# Altium PCB PCB0.PcbDoc
Units mil, origin at the board's own origin, x right, y up, seen from the top; angles counter-clockwise.
Board outline 3640 x 1815 mil, 4 copper layers (Top Layer, Layer 1, Layer 2, Bottom Layer), stack 23.756 mil thick; 46 components, 13 nets, 145 pads, 247 vias.
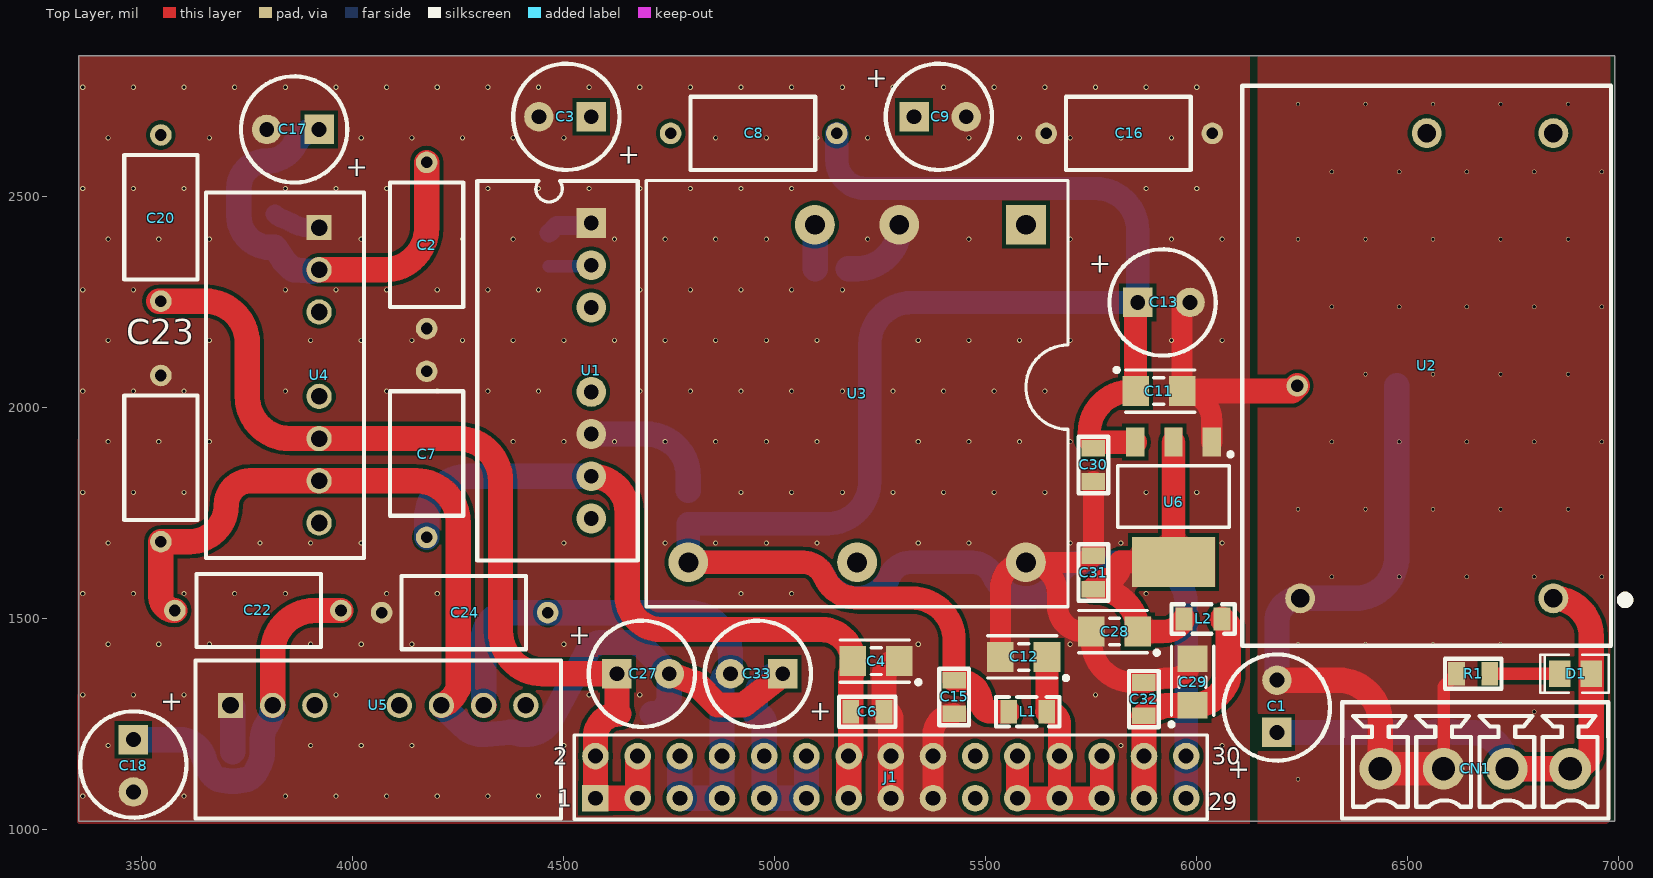
[diagram p0: Top Layer view]
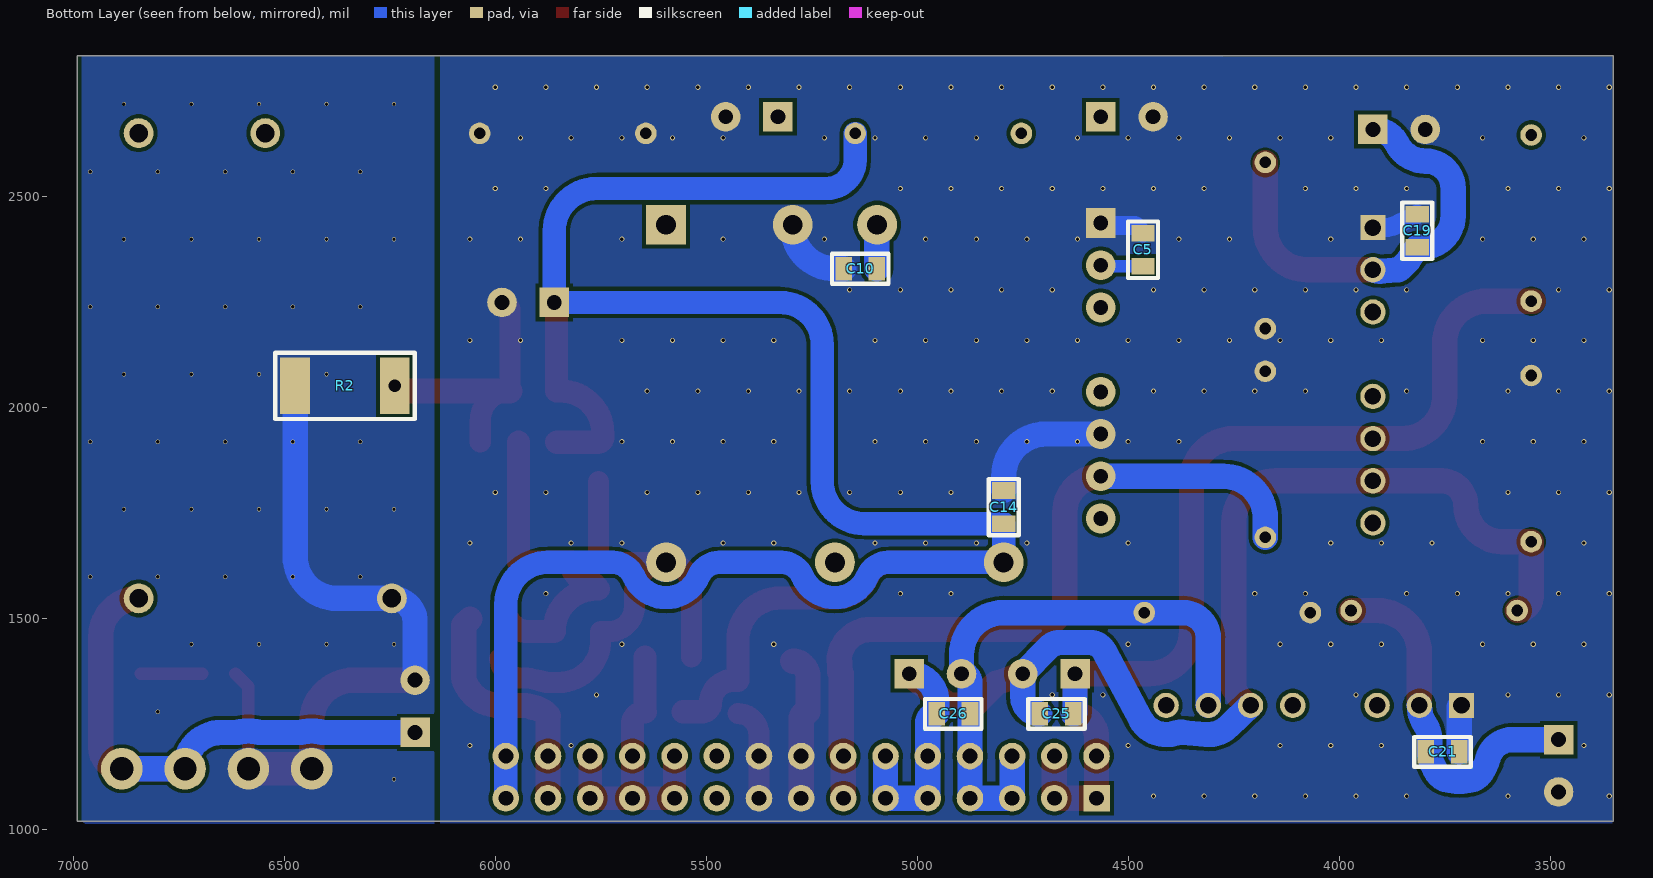
[diagram p1: Bottom Layer view, seen from below]
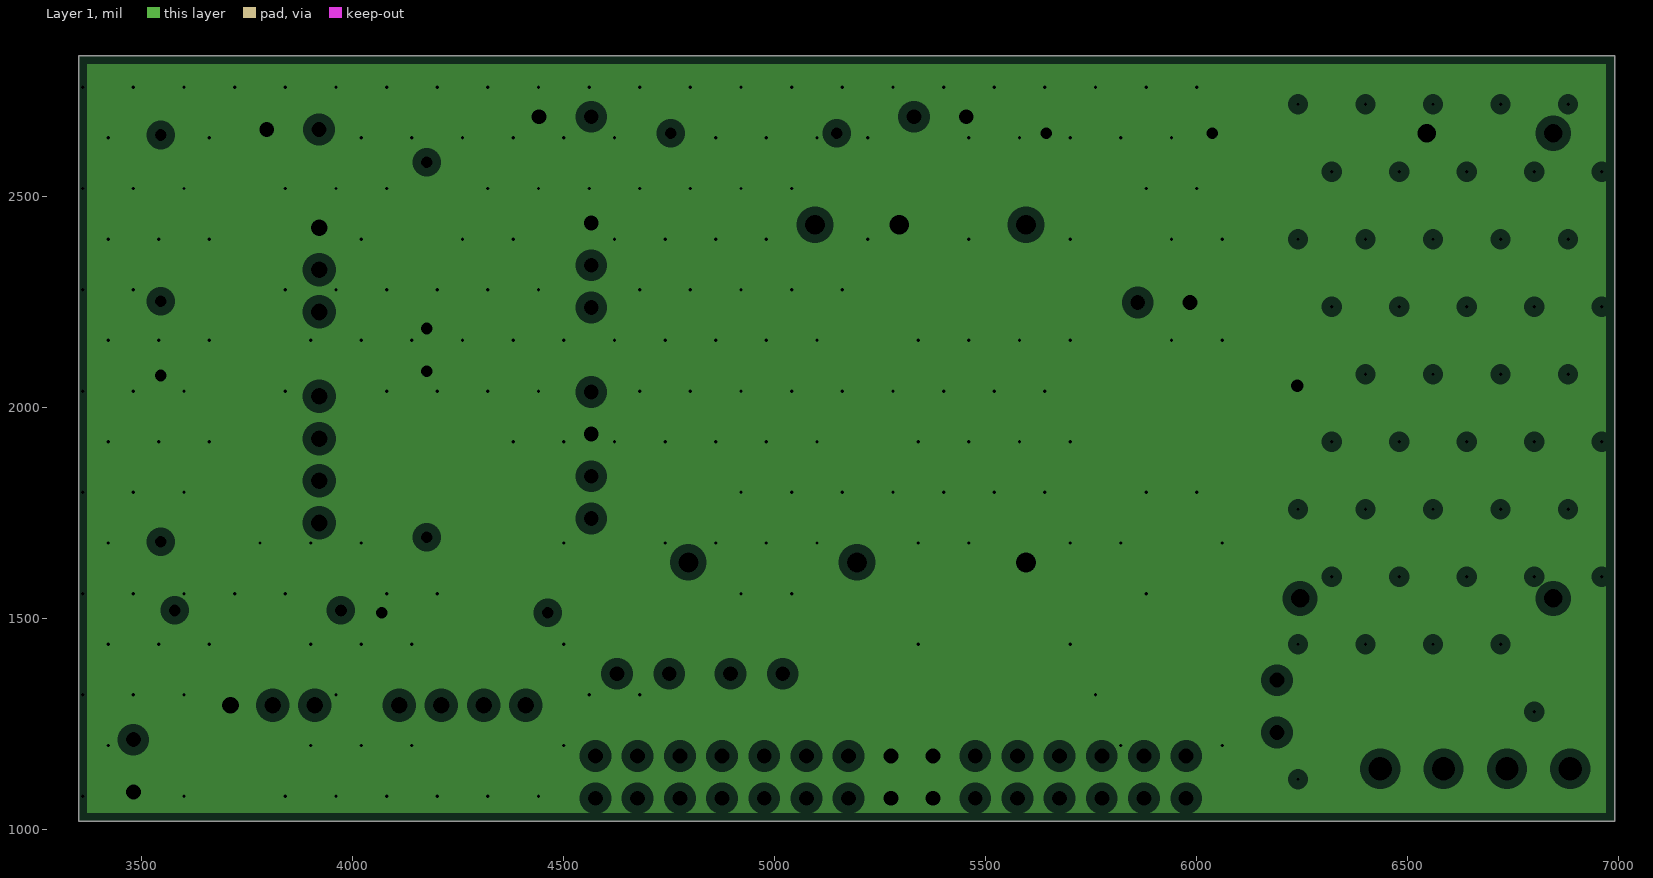
[diagram p2: Layer 1, clearances drawn from the general rule]
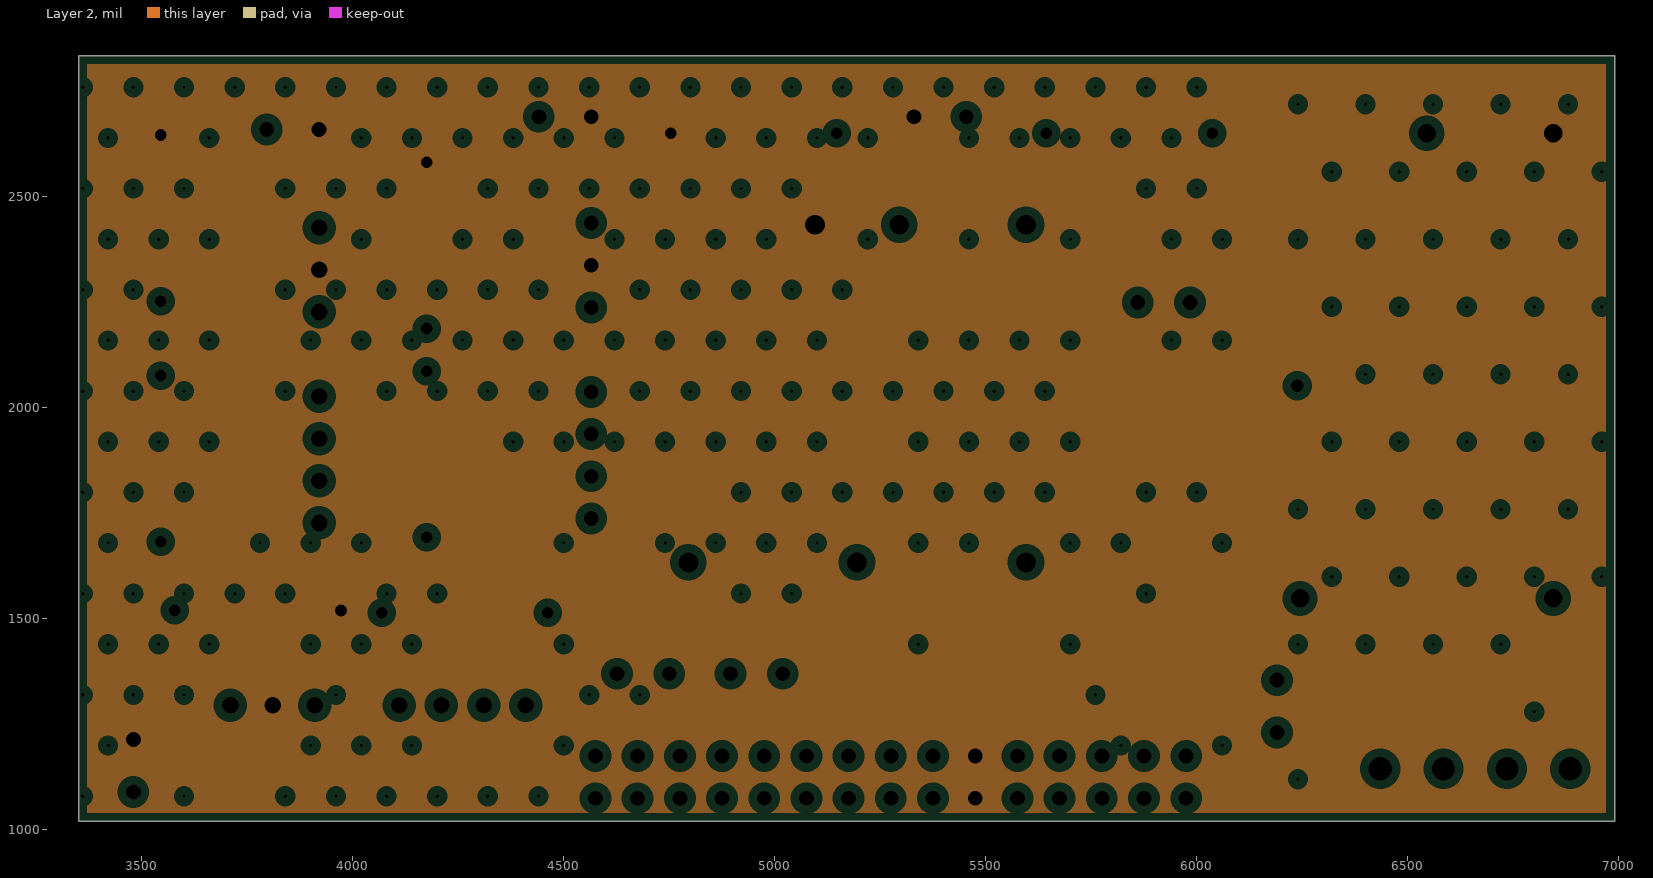
[diagram p3: Layer 2, clearances drawn from the general rule]

## Layer stack, top to bottom
Top Solder: solder mask 0.4, Solder Resist, Dk 3.5
Top Layer: signal copper 1.4
Dielectric 2: prepreg 2.8, PP-006, Dk 4.1
Layer 1: plane copper 1.378, net AGND
Dielectric 1: dielectric 12.6, FR-4, Dk 4.8
Layer 2: plane copper 1.378, net A12V
Dielectric 3: prepreg 2.8, PP-006, Dk 4.1
Bottom Layer: signal copper 1.4
Bottom Solder: solder mask 0.4, Solder Resist, Dk 3.5

## Board outline
3350,1020 3350,2835 6990,2835 6990,1020

## Design rules (kind name [scope] priority, off if disabled: settings)
Clearance [All] p1: gap=9 ignorepadtopadclearanceinfootprint=TRUE
PlaneClearance [All] p1: clearance=20
PlaneConnect [All] p1: planeconnectstyle=Relief reliefexpansion=20 reliefentries=4 reliefconductorwidth=10 reliefairgap=10
PolygonConnect [All] p1: connectstyle=Direct reliefconductorwidth=10 reliefentries=4 polygonreliefangle="90 Angle" airgapwidth=10
RoutingVias [All] p1: holewidth=40 width=50 viastyle="Through Hole" minholewidth=1 minwidth=1 maxholewidth=50 maxwidth=50
SolderMaskExpansion [All] p1: expansion=4 istentingtop=FALSE
Width [All] p1: maxlimit=80 minlimit=10 preferedwidth=10 checkconnectedcopper=TRUE
28 further rules are at their usual default settings.

## Components (designator, comment, footprint, x,y, rotation, side; value= is the part's Value field where it differs from the comment)
C1 "100uf 25V 贴片铝电解" "CAP/6.4mm -" 6190,1190 r90 top
C2 "1nF" CAP-TH_L7.5-W4.5-P10.00-D0.6 4175,2385 r270 top
C3 "100uf 25V 贴片铝电解" "CAP/6.4mm -" 4606,2690 r180 top
C4 "22uf 16V" "1206 (钽电容)" 5295.24,1400 r180 top
C5 "105" 0805 4465,2375 r90 bottom value=0.1UF
C6 "104" 0805 5219.37,1280 r180 top value=0.1UF
C7 "1nF" CAP-TH_L7.5-W4.5-P10.00-D0.6 4175,1890 r270 top
C8 "1nF" CAP-TH_L7.5-W4.5-P10.00-D0.6 4950,2650.63 r0 top
C9 "100uf 25V 贴片铝电解" "CAP/6.4mm -" 5289,2690 r0 top
C10 "105" 0805 5135,2330 r0 bottom value=0.1UF
C11 "22uf 16V" "1206 (钽电容)" 5855,2040 r0 top
C12 "22uf 16V" "1206 (钽电容)" 5645,1410 r180 top
C13 "100uf 25V 贴片铝电解" "CAP/6.4mm -" 5819,2250 r0 top
C14 "105" 0805 4795,1765 r90 bottom value=0.1UF
C15 "104" 0805 5425,1315 r90 top
C16 "1nF" CAP-TH_L7.5-W4.5-P10.00-D0.6 5840,2650.63 r0 top
C17 "100uf 25V 贴片铝电解" "CAP/6.4mm -" 3961,2660 r180 top
C18 "100uf 25V 贴片铝电解" "CAP/6.4mm -" 3480,1255 r270 top
C19 "105" 0805 3815,2420 r90 bottom value=0.1UF
C20 "1nF" CAP-TH_L7.5-W4.5-P10.00-D0.6 3545,2450 r270 top
C21 "105" 0805 3755,1185 r180 bottom value=0.1UF
C22 "1nF" CAP-TH_L7.5-W4.5-P10.00-D0.6 3775,1520 r180 top
C23 "1nF" CAP-TH_L7.5-W4.5-P10.00-D0.6 3545,1880 r270 top
C24 "1nF" CAP-TH_L7.5-W4.5-P10.00-D0.6 4265,1515 r0 top
C25 "105" 0805 4670,1275 r0 bottom value=0.1UF
C26 "105" 0805 4914.37,1275 r180 bottom value=0.1UF
C27 "100uf 25V 贴片铝电解" "CAP/6.4mm -" 4585,1370 r0 top
C28 "22uf 16V" "1206 (钽电容)" 5860.3,1470 r180 top
C29 "10uf 6.3V" "1206 (钽电容)" 5990,1295 r90 top
C30 "104" 0805 5755,1865 r90 top
C31 "104" 0805 5755,1610 r270 top
C32 "104" 0805 5874.63,1310 r270 top
C33 "100uf 25V 贴片铝电解" "CAP/6.4mm -" 5060,1370 r180 top
CN1 "DB2EVC-3.81-4P-GN" CONN-TH_4P-P3.81_DB2EVC-3.81-4P 6660,1145 r180 top
D1 "LED0" l0805 6935,1370 r0 top
J1 "HIF3FC-30PA-2.54DSA" HDR2.54-LI-2x15P 5275,1125 r0 top
L1 "1uH" "L 0805" 5599.52,1280 r0 top
L2 "1uH" "L 0805" 6015,1500 r0 top
R1 "4.7k" 0805 6655,1370 r0 top value=1K
R2 "DNP" 2512 6360,2065 r180 bottom
U1 "VRB1205S-6WR3" VRB_S-6WR3 4565,2438.15 r0 top
U2 "FT-AX1D" PWRM-TH_MORNSUN_FT-AX1D 6545,2100 r90 top
U3 "URB2405YMD-15W" URB-YMD-15WR3 5595,2434.21 r270 top
U4 "VRB1212S-6WR3" PWRM-TH_VRB2405S-6WR3 3920,2077.44 r270 top
U5 "VRB1212S-6WR3" PWRM-TH_VRB2405S-6WR3 4060,1295 r0 top
U6 "ams1117-3.3" SOT-223 5945,1790 r180 top

## Footprints (in the part's own frame and the unit in brackets; to place one, negate y for a bottom-side part, rotate by r counter-clockwise, add the part's x,y. Pads: shape width x height; smd on the part's side, far side on the other; paste and mask are expansions set on the pad)
0805 [mm]
  rect 1x1.4 smd: 1(-1,0) 2(1,0)
  silkscreen extent -1.7,-0.9 1.7,0.9
"1206 (钽电容)" [mm]
  rect 1.6x1.8 smd: 1(0,0) 2(2.8,0)
  silkscreen extent -1.27,-1.27 3.56,1.39
2512 [mm]
  rect 1.8x3.4 smd: 1(-2.903,-0.324) 2(3.097,-0.324)
  silkscreen extent -4.1,-2.32 4.3,1.68
CAP-TH_L7.5-W4.5-P10.00-D0.6 [mm]
  round 1.3 hole 0.7: 1(-5,0) 2(5,0)
  silkscreen extent -3.8,-2.2 3.7,2.2
"CAP/6.4mm -" [mil]
  rect 70x70 hole 35: 1(41,0)
  round 70 hole 35: 2(165,0)
  silkscreen extent -26,-126 226,126
CONN-TH_4P-P3.81_DB2EVC-3.81-4P [mm]
  round 2.5 hole 1.4 paste-2539.97 mask+0.05: 1(-5.715,0) 2(-1.905,0) 3(1.905,0) 4(5.715,0)
  silkscreen extent -8.02,-4 8.02,3
HDR2.54-LI-2x15P [mm] "双排排针，15x2脚"
  rect 1.6x1.6 hole 0.9: 1(-17.78,-1.27)
  round 1.6 hole 0.9: 2(-17.78,1.27) 3(-15.24,-1.27) 4(-15.24,1.27) 5(-12.7,-1.27) 6(-12.7,1.27) 7(-10.16,-1.27) 8(-10.16,1.27) 9(-7.62,-1.27) 10(-7.62,1.27) 11(-5.08,-1.27) 12(-5.08,1.27) 13(-2.54,-1.27) 14(-2.54,1.27) 15(0,-1.27) 16(0,1.27) 17(2.54,-1.27) 18(2.54,1.27) 19(5.08,-1.27) 20(5.08,1.27) 21(7.62,-1.27) 22(7.62,1.27) 23(10.16,-1.27) 24(10.16,1.27) 25(12.7,-1.27) 26(12.7,1.27) 27(15.24,-1.27) 28(15.24,1.27) 29(17.78,-1.27) 30(17.78,1.27)
  silkscreen extent -19.05,-2.54 19.05,2.54, body extent -19.05,-2.54 19.05,2.54, height 8.5
l0805 [mm]
  rect 1.3x1.6 smd: 1(0,0) 2(-1.9,0)
  silkscreen extent -3.08,-1.15 1.05,1.15
"L 0805" [mil] "小功率贴片电感"
  rect 40x55 smd: 1(-45,0) 2(45,0)
  silkscreen extent -75,-35 75,35, body extent -39,-24 39,24, height 35
PWRM-TH_MORNSUN_FT-AX1D [mm]
  round 1.8 hole 1.1 paste-2539.97 mask+0.05: 1(-14,-7.62) 2(-14,7.62) 3(14,0) 4(14,-7.62)
  silkscreen extent -16.85,-12.19 16.85,11.1
PWRM-TH_VRB2405S-6WR3 [mil]
  rect 60x60 hole 39.37: 1(-350,0)
  round 60 hole 39.37: 2(-250,0) 3(-150,0) 5(50,0) 6(150,0) 7(250,0) 8(350,0)
  silkscreen extent -433,-268 433,106
SOT-223 [mm]
  rect 1.1x1.75 smd: 1(-2.3,-3.275) 2(0,-3.275) 3(2.3,-3.275)
  rect 5x3 smd: 2(0,3.937)
  silkscreen extent -3.55,-2.66 3.35,1.85
URB-YMD-15WR3 [mm]
  rect 2.4x2.4 hole 1.2: 1(0,0)
  round 2.4 hole 1.2: 2(0,-7.62) 3(0,-12.7) 4(20.32,-20.32) 5(20.32,-10.16) 6(20.32,0)
  silkscreen extent -2.67,-22.86 22.99,2.54
VRB_S-6WR3 [mm]
  rect 1.8x1.8 hole 0.9: 1(0,0)
  round 1.8 hole 0.9: 2(0,-2.54) 3(0,-5.08) 5(0,-10.16) 6(0,-12.7) 7(0,-15.24) 8(0,-17.78)
  silkscreen extent -6.86,-20.32 2.79,2.54

## Part data
C1 C3 C4 C9 C11 C12 C13 C17 C18 C27 C28 C29 C33: library part "Cap Pol1", "Polarized Capacitor (Radial)", LatestRevisionDate=17-Jul-2002, LatestRevisionNote="Re-released for DXP Platform.", Published=8-Jun-2000, Publisher="Altium Limited"
  C3 C4 C9 C11 C12 C13 C17 C18 C27 C28 C29 C33: ClassName=Power
C2 C7 C8 C16 C20 C22 C23 C24: library part KY1102M400VAC70Y10093, "等级:Y1;容值:1nF;精度:±20%;电压(AC):400V;", LCSC Part Name="等级:Y1 1nF ±20% 400V", Manufacturer=KNSCHA(科尼盛), Tolerance=±20%, Voltage(AC)=400V, Add into BOM=yes, Convert to PCB=yes, Datasheet=https://atta.szlcsc.com/upload/public/pdf/source/20220125/2D2B80E2C5D988A5B116EA64517B63EA.pdf, Device=KY1102M400VAC70Y10093, Manufacturer Part=KY1102M400VAC70Y10093, Name=1nF, Subclass=Y1, Supplier=LCSC, Supplier Footprint=插件,P=10mm, Supplier Part=C2943996, Symbol=KY1102M400VAC70Y10093
C5 C6 C10 C14 C19 C21 C25 C26: library part Cap, "Capacitor", ClassName=Power, LatestRevisionDate=17-Jul-2002, LatestRevisionNote="Re-released for DXP Platform.", PackageReference=RAD-0.3, Published=8-Jun-2000, Publisher="Altium Limited"
C15 C30 C31 C32: library part "Cap Semi", "Capacitor (Semiconductor SIM Model)", ClassName=Power, LatestRevisionDate=17-Jul-2002, LatestRevisionNote="Re-released for DXP Platform.", PackageReference=C1206, Published=8-Jun-2000, Publisher="Altium Limited"
CN1: Color=绿色, Current Rating (Max)=10A, JLCPCB Part Class="Extended Part", LCSC Part Name="3.81mm 1x4P 排数:1 每排P数:4", Manufacturer=DIBO(地博电气), Operating Temperature Range=-40℃~+105℃, Voltage Rating (Max)=250V, Add into BOM=yes, Connector Type=板端/插座-闭口, Convert to PCB=yes, Datasheet=https://atta.szlcsc.com/upload/public/pdf/source/20230106/E295F87ABDAA44E449E4D4A582259339.pdf, Device=DB2EVC-3.81-4P-GN, Manufacturer Part=DB2EVC-3.81-4P-GN, Mounting Style=直针, Name=DB2EVC-3.81-4P-GN, Number of Pins=4P, Number of PINs Per Row=4, Number of Rows=1, Pitch=3.81mm, Structure=1x4P, Supplier=LCSC, Supplier Footprint=插件,P=3.81mm, Supplier Part=C395697, Symbol=DB2EVC-3.81-4P
D1: "Typical INFRARED GaAs LED", LatestRevisionDate=08-Jul-2005, LatestRevisionNote="Mech Layer 1 removed.", PackageDescription="LED; 2 Leads", PackageReference=LED-0, Published=8-Jun-2000, Publisher="Altium Limited"
J1: "Connector", Manufacturer_Name=Hirose, Manufacturer_Part_Number=HIF3FC-30PA-2.54DSA(71), Mouser Part Number=798-HIF3FC30PA254D71, Datasheet Link=https://datasheet.datasheetarchive.com/originals/distributors/SFDatasheet-7/sf-000141320.pdf, Height=12mm, Mouser Price/Stock=https://www.mouser.co.uk/ProductDetail/Hirose-Connector/HIF3FC-30PA-254DSA71?qs=eDUdFcBPps32%2FyAdBVx6ww%3D%3D, System=Connector
L1 L2: library part L, "小功率贴片电感", BOM名称=小功率贴片电感, 学习资源=www.ooocke.com, 版权归属=源创客
R1 R2: library part Res2, "Resistor", LatestRevisionDate=17-Jul-2002, LatestRevisionNote="Re-released for DXP Platform.", PackageReference=AXIAL-0.4, Published=8-Jun-2000, Publisher="Altium Limited"
  R1: PackageDescription="Axial Device, Thru-Hole; 2 Leads; 0.4 in Pin Spacing"
  R2: ClassName=Power
U1 U3: library part Component_1, ClassName=Power
U2: JLCPCB Part Class=扩展库, Manufacturer=MORNSUN(金升阳), Add into BOM=yes, Convert to PCB=yes, Datasheet=https://atta.szlcsc.com/upload/public/pdf/source/20220812/46717D78754D3A4E3C88374812D1964E.pdf, Device=FT-AX1D, LCSC Part Name=FT-AX1D, Manufacturer Part=FT-AX1D, Name=FT-AX1D, Supplier=LCSC, Supplier Footprint=插件, Supplier Part=C5127623, Symbol=FT-AX1D
U4 U5: "输入电压(DC):9V~18V;输出电压:12V;输出电流(最大值):500mA;输出功率:6W;转换效率:84%;", Input Voltage(DC)=9V~18V, JLCPCB Part Class=扩展库, LCSC Part Name="输入9V~18V 输出12V 500mA 6W", Manufacturer=MORNSUN(金升阳), Output Current (Max)=500mA, Output Power=6W, Output Voltage=12V, Add into BOM=yes, Conversion Efficiency=84%, Convert to PCB=yes, Datasheet=https://atta.szlcsc.com/upload/public/pdf/source/20210113/C2684875_85B724204689EA7052A85B7ABECFAE60.pdf, Device=VRB1212S-6WR3, Manufacturer Part=VRB1212S-6WR3, Name=VRB1212S-6WR3, Output Channel=1, Supplier=LCSC, Supplier Footprint=插件, Supplier Part=C2684876, Symbol=VRB1212S-6WR3
U6: library part LM1117, ClassName=Power

## Via types
v1: diameter 12/12 (per signal layer), hole 8, Top Layer to Bottom Layer, tented both sides, 201 vias
v2: diameter 10, hole 8, Top Layer to Bottom Layer, tented both sides, 45 vias
v3: diameter 50, hole 30, Top Layer to Bottom Layer, tented both sides, 1 vias

## Nets (pads, with @x,y where several pads share a name; then routed paths per layer and width w, separated by ;. In a path a pad name is that pad's centre, name@x,y a point inside that pad or via, vN(x,y) a via of type N, cw(c..) or ccw(c..) an arc to the next point about the centre after c; other vN are vias at no path point)
12VGND: C22.2 C23.2 C25.2 C26.1 C27.2 C33.1 J1.9 J1.10 J1.11 J1.12 U4.7 U5.6 | length 3172.6
  Top Layer w60: C22.2 cw(c3578.15,1553.15) 3545,1553.15 C23.2 3613.15,1683.15 ccw(c3613.15,1770) 3700,1770 cw(c3757.44,1770) 3757.44,1827.44 U4.7 4150,1827.44 cw(c4150,1727.44) 4250,1727.44 4250,1335 4241.5,1320.78 cw(c4190,1351.57) U5.6 ; C27.2 4812.82,1347.53 4864.35,1296 4925.65,1296 cw(c4949.7,1265.3) 4925.69,1296.03 5013.96,1364.97 cw(c5037.96,1334.23) 5014,1365 C33.1
  Bottom Layer w60: U5.6 4262.39,1245.06 ccw(c4310,1295) 4315.99,1226.26 4371.76,1231.12 cw(c4375.67,1186.29) 4389.29,1229.18 4389.46,1229.13 ccw(c4410,1295) 4470.89,1262.55 4556.58,1423.34 cw(c4591,1405) 4591,1444 4661,1444 cw(c4661,1405) 4688.83,1432.32 4749.93,1370.07 ccw(c4777.76,1397.39) C27.2 4750,1315.63 cw(c4709.37,1315.63) C25.2 ; C33.1 5014,1369.81 ccw(c5019,1304.74) 4969.14,1346.84 ccw(c5015,1308.16) 4961.71,1335.73 cw(c4895,1370) 4961.02,1334.42 ccw(c5013.92,1306.1) 4956.08,1322.04 ccw(c5019,1304.74) 4953.74,1304.74 C26.1 cw(c4953.74,1253.74) 4975,1253.74 J1.10 J1.9 J1.11 J1.12
+12: C20.2 C25.1 C27.1 J1.1 J1.2 J1.3 J1.4 U4.6 | length 2424.5
  Top Layer w60: C20.2@3540,2253.15 C20.2 3650,2253.15 cw(c3650,2153.15) 3750,2153.15 3750,2027.44 ccw(c3850,2027.44) 3850,1927.44 U4.6 4250,1927.44 cw(c4250,1827.44) 4350,1827.44 4350,1470 ccw(c4450,1470) 4450,1370 C27.1 4626,1279.63 ccw(c4630.63,1279.63) 4630.63,1275 ccw(c4630.63,1219.37) 4575,1219.37 J1.2 J1.1 J1.3 J1.4
  Bottom Layer w60: C27.1 4626,1279.63 ccw(c4630.63,1279.63) C25.1
-12: C24.2 C26.2 C33.2 J1.5 J1.6 J1.7 J1.8 U5.7 | length 1387.7
  Bottom Layer w60: U5.7 4310,1455 cw(c4370,1455) 4370,1515 C24.2 4795,1515 cw(c4795,1415) 4895,1415 C33.2 ccw(c4895,1350) 4875,1350 C26.2 J1.8 J1.7 J1.5 J1.6
A12V: C2.1 C3.1 C5.1 C8.1 C9.1 C10.1 C17.1 C18.1 C19.1 C20.1 C21.1 C22.1 J1.19 J1.20 U1.2 U2.4 U3.3 U4.2 U5.2 | length 2107.9
  Top Layer w60: U5.2 3810,1420 cw(c3910,1420) 3910,1520 C22.1 ; U4.2 4075,2327.44 ccw(c4075,2427.44) 4175,2427.44 C2.1
  Bottom Layer w30: C5.1 4465.44,2336.07 4562.92,2336.07 U1.2
  Bottom Layer w60: C18.1 3589.49,1214 cw(c3589.38,1154) 3647.64,1168.36 ccw(c3715.63,1185) 3655.34,1149.43 cw(c3603.63,1119.01) 3659,1142.1 ccw(c3695.94,1157.44) 3693.44,1117.52 cw(c3689.53,1057.65) 3701.51,1116.44 ccw(c3715.63,1185) 3729.76,1116.44 cw(c3741.73,1057.65) 3737.81,1117.52 ccw(c3735.32,1157.44) 3772.27,1142.14 cw(c3827.63,1119.01) 3775.9,1149.39 ccw(c3715.63,1185) 3785.63,1185 3785.63,1215.87 cw(c3845.63,1215.76) 3795.96,1249.42 ccw(c3729,1295) U5.2 ; U4.2 cw(c3900.46,2384.17) 3895,2324.42 3859.91,2327.62 3857.58,2328.06 3840.44,2345.2 3836.48,2349.16 C19.1 3804.37,2380.63 cw(c3804.37,2455) 3730,2455 3730,2520.16 cw(c3794.85,2520.16) 3794.85,2585.01 ccw(c3796,2660) 3863.23,2626.76 cw(c3916.93,2600) 3913.07,2659.88 3915,2659.88 C17.1 ; U3.3 5095.63,2434.21 C10.1
A+5V: C12.1 J1.21 J1.22 J1.23 J1.24 J1.25 J1.26 L1.2 | length 752.4
  Top Layer w55: J1.22 J1.21 J1.23 ; L1.2 cw(c5644.52,1249.52) L1.2@5645,1280 ; C12.1 L1.2@5645,1280 ; J1.26 J1.25 J1.23 ; L1.2@5645,1280 cw(c5644.52,1249.52) 5675,1249.52 J1.24 J1.23
A-5V: C4.2 C6.2 C7.2 J1.13 J1.14 U1.7 | length 1774.7
  Top Layer w60: U1.7 cw(c4565,1753.15) 4650,1753.15 4650,1555 ccw(c4730,1555) 4730,1475 5110,1475 cw(c5110,1400) C4.2 5183.5,1398.5 5183.5,1374 5180,1370.5 C6.2 5180,1180.81 5175,1175.81 J1.14 ; J1.13@5175,1075.81 J1.14@5175,1174.19
  Bottom Layer w60: C7.2 4175,1738.15 cw(c4275,1738.15) 4275,1838.15 U1.7
AGND: C2.2 C3.2 C4.1 C5.2 C6.1 C7.1 C9.2 C10.2 C11.2 C12.2 C13.2 C14.2 C15.1 C16.1 C16.2 C17.2 C18.2 C19.2 C21.2 C23.1 C24.1 C28.2 C29.2 C30.1 C31.1 C32.1 J1.15 J1.16 J1.17 J1.18 R2.2 U1.1 U1.6 U2.3 U3.2 U3.6 U4.1 U5.1 U6.1 | length 3285.7
  Top Layer w50: J1.17 J1.18 5375,1225.63 cw(c5425,1225.63) C15.1 ; C12.2 5534.76,1573.98 cw(c5595,1573.98) U3.6 ; C30.1 C31.1 cw(c5719.14,1684.21) 5719.14,1634.21 U3.6 ; C13.2 ccw(c5984,2231.24) 5965.24,2231.24 C11.2 cw(c5965.24,1969.69) 6035.55,1969.69 U6.1 ; C29.2 5986.39,1398.74 5986.39,1391.01 cw(c5940.26,1410.28) 5948.74,1361.01 ccw(c5954.57,1326.5) 5947.97,1360.87 cw(c5938.69,1410) 5938.79,1360 5934.25,1360 ccw(c5934.36,1235) 5897.85,1354.55 cw(c5883.4,1402.42) 5893.94,1353.54 ccw(c5919.91,1231.27) 5884.71,1351.21 cw(c5870.74,1399.22) C32.1 5850.06,1349.37 cw(c5850.06,1449.37) 5750.06,1449.37 C28.2 5730,1470 cw(c5730,1530) 5670,1530 5670,1559.21 ccw(c5595,1559.21) U3.6
  Top Layer w60: J1.15 J1.16 5275,1263.74 ccw(c5258.74,1263.74) C6.1 5258.74,1363.5 cw(c5295.24,1363.5) C4.1 ; C11.2 6225.83,2040 v3(6238.09,2052.26)
  Bottom Layer w45: C19.2 ccw(c3854.59,2504.45) 3836.22,2447.34 cw(c3815,2380.63) 3850.62,2440.89 ccw(c3880.99,2492.63) 3857.85,2437.28 cw(c3842.56,2400.32) 3862.26,2435.13 ccw(c3891.64,2487.44) 3891.54,2427.44 U4.1 ; C5.2 4483.35,2432.72 4559.57,2432.72 U1.1
  Bottom Layer w60: U5.1 cw(c3710,1289.37) 3715.63,1289.37 C21.2 ; U1.6 4695,1938.15 cw(c4695,1838.15) 4795,1838.15 C14.2 ; C10.2 5195,2330 ccw(c5195,2430) 5295,2430 U3.2
  other v1: 3360,1080 3600,1080 3840,1080 3960,1080 4080,1080 4200,1080 4320,1080 4440,1080 3420,1200 3900,1200 4020,1200 4140,1200 4500,1200 5820,1200 6060,1200 3360,1320 3480,1320 3600,1320 3960,1320 4560,1320 4680,1320 5760,1320 3420,1440 3540,1440 3660,1440 3900,1440 4020,1440 4140,1440 4500,1440 5340,1440 5700,1440 3360,1560 3480,1560 3600,1560 3720,1560 3840,1560 4080,1560 4200,1560 4920,1560 5040,1560 5880,1560 3420,1680 3780,1680 3900,1680 4020,1680 4500,1680 4740,1680 4860,1680 4980,1680 5100,1680 5340,1680 5460,1680 5700,1680 5820,1680 6060,1680 3360,1800 3480,1800 3600,1800 4920,1800 5040,1800 5160,1800 5280,1800 5400,1800 5520,1800 5640,1800 5880,1800 6000,1800 3420,1920 3540,1920 3660,1920 4380,1920 4500,1920 4620,1920 4740,1920 4860,1920 4980,1920 5100,1920 5340,1920 5460,1920 5580,1920 5700,1920 3360,2040 3480,2040 3600,2040 3840,2040 4080,2040 4200,2040 4320,2040 4440,2040 4680,2040 4800,2040 4920,2040 5040,2040 5160,2040 5280,2040 5400,2040 5520,2040 5640,2040 3420,2160 3540,2160 3660,2160 3900,2160 4020,2160 4140,2160 4260,2160 4380,2160 4500,2160 4620,2160 4740,2160 4860,2160 4980,2160 5100,2160 5340,2160 5460,2160 5580,2160 5700,2160 5940,2160 6060,2160 3360,2280 3480,2280 3840,2280 3960,2280 4080,2280 4200,2280 4320,2280 4440,2280 4680,2280 4800,2280 4920,2280 5040,2280 5160,2280 3420,2400 3540,2400 3660,2400 4020,2400 4260,2400 4380,2400 4620,2400 4740,2400 4860,2400 4980,2400 5220,2400 5460,2400 5700,2400 5940,2400 6060,2400 3360,2520 3480,2520 3600,2520 3840,2520 3960,2520 4080,2520 4320,2520 4440,2520 4560,2520 4680,2520 4800,2520 4920,2520 5040,2520 5880,2520 6000,2520 3420,2640 3660,2640 4020,2640 4140,2640 4260,2640 4380,2640 4500,2640 4620,2640 4860,2640 4980,2640 5100,2640 5220,2640 5460,2640 5580,2640 5700,2640 5820,2640 5940,2640 3360,2760 3480,2760 3600,2760 3720,2760 3840,2760 3960,2760 4080,2760 4200,2760 4320,2760 4440,2760 4560,2760 4680,2760 4800,2760 4920,2760 5040,2760 5160,2760 5280,2760 5400,2760 5520,2760 5640,2760 5760,2760 5880,2760 6000,2760
AVDD: C29.1 C32.2 J1.27 J1.28 L2.2 | length 579
  Top Layer w60: J1.27 J1.28 5875,1270.26 C32.2 cw(c5919.91,1231.27) 5909.24,1290.31 ccw(c5902.19,1329.68) 5915.13,1291.83 cw(c5934.36,1235) 5934.25,1295 C29.1 ccw(c5990,1383.38) 6075,1359.17 6075,1485 L2.2
D12V1: C1.1 CN1.1 CN1.2 D1.1 U2.1 | length 1378.7
  Top Layer w60: CN1.2 CN1.1 ccw(c6885,1195) 6935,1195 D1.1 6935,1458.82 ccw(c6845,1458.82) U2.1
  Bottom Layer w60: C1.1 6404.31,1231 ccw(c6404.2,1291) 6416.51,1232.28 cw(c6435,1145) 6453.5,1232.27 ccw(c6465.8,1291) 6465.69,1231 6554.31,1231 ccw(c6554.2,1291) 6566.51,1232.28 cw(c6585,1145) 6603.5,1232.27 ccw(c6615.8,1291) 6615.69,1231 6649,1231 cw(c6649,1145) CN1.2 CN1.1
D12VGND: C1.2 CN1.3 CN1.4 R1.1 R2.1 U2.2 | length 1714.8
  Top Layer w30: CN1.3 6585,1339.37 R1.1
  Top Layer w60: C1.2 6335,1355 cw(c6335,1255) 6435,1255 CN1.4
  Top Layer w80: CN1.4 CN1.3
  Bottom Layer w60: C1.2 6190,1493.82 cw(c6245,1493.82) U2.2 6374.31,1548.82 ccw(c6374.31,1648.82) 6474.31,1648.82 R2.1
  other v2: 6240,1120 6800,1280 6240,1440 6400,1440 6560,1440 6720,1440 6320,1600 6480,1600 6640,1600 6800,1600 6960,1600 6240,1760 6400,1760 6560,1760 6720,1760 6880,1760 6320,1920 6480,1920 6640,1920 6800,1920 6960,1920 6400,2080 6560,2080 6720,2080 6880,2080 6320,2240 6480,2240 6640,2240 6800,2240 6960,2240 6240,2400 6400,2400 6560,2400 6720,2400 6880,2400 6320,2560 6480,2560 6640,2560 6800,2560 6960,2560 6240,2720 6400,2720 6560,2720 6720,2720 6880,2720
D+5V: C8.2 C11.1 C13.1 C14.1 C15.2 C30.2 J1.29 J1.30 L1.1 U3.4 U6.3 | length 5963.4
  Top Layer w55: U3.4 5066.64,1634.21 cw(c5066.53,1579.21) 5117.08,1600.89 ccw(c5195,1634.21) 5190.51,1549.59 ccw(c5195,1634.21) 5198.58,1549.54 cw(c5200.77,1494.59) 5200.66,1549.59 5325,1549.59 cw(c5325,1449.59) 5425,1449.59 C15.2 5435.63,1354.37 cw(c5435.63,1300) 5490,1300 ccw(c5510,1300) 5510,1280 L1.1 ; U6.3 5756.06,1918.94 cw(c5756.06,1930) 5745,1930 5745,1940 cw(c5845,1940) 5845,2040 C11.1 5855,2245 cw(c5860,2245) C13.1
  Bottom Layer w55: C8.2 5146.85,2588.15 ccw(c5215,2588.15) 5215,2520 5760,2520 cw(c5760,2420) 5860,2420 C13.1 5325,2250 ccw(c5325,2150) 5225,2150 5225,1825.63 cw(c5125,1825.63) 5125,1725.63 C14.1 U3.4 5067.73,1634.21 cw(c5067.62,1579.21) 5118.08,1601.09 ccw(c5195,1634.21) 5271.93,1601.12 cw(c5322.38,1579.21) 5322.27,1634.21 5467.73,1634.21 cw(c5467.62,1579.21) 5518.08,1601.09 ccw(c5595,1634.21) 5671.93,1601.12 cw(c5722.38,1579.21) 5722.27,1634.21 5875,1634.21 cw(c5875,1534.21) 5975,1534.21 J1.30 J1.29
NetC28_1: C28.1 C31.2 L2.1 U6.2 | length 791.7
  Top Layer w55: U6.2@5945,1918.94 5945,1635 5819.37,1635 ccw(c5874.06,1629.14) 5819.06,1629.54 cw(c5782.56,1629.68) 5790.79,1594.13 ccw(c5803.35,1540.58) 5775.61,1588.07 cw(c5719.14,1684.21) 5772.97,1586.57 ccw(c5799.6,1538.44) C31.2 5760.3,1570.63 cw(c5760.3,1470.63) 5860.3,1470.63 C28.1 5921.01,1470 ccw(c5921.01,1525) L2.1
NetD1_2: D1.2 R1.2 | length 145.6
  Top Layer w30: R1.2 D1.2@6840,1370
pads on no net: U1.3 U1.5 U1.8 U3.1 U3.5 U4.3 U4.5 U4.8 U5.3 U5.5 U5.8

## Polygon pours and split planes (outlines as drawn)
AGND on Bottom Layer "AGND_L04_P002" (solid, remove dead copper, pour order 2): 3352.88,2832.12 6130.38,2835.27 6130.38,1015.27 3352.88,1015.27
D12VGND on Bottom Layer "D12VGND_L04_P001" (solid, remove dead copper, pour order 1): 6145,2835 6980,2835 6980,1025 cw(c6970,1025) 6970,1015 6145,1015
NetC28_1 on Top Layer "NETC28_1_L01_P004" (solid, remove dead copper, pour order 4): 5700,1965 6110,1965 6110,1440 5705,1440
AGND on Top Layer "AGND_L01_P000" (solid, remove dead copper, pour order 0): 3350,2835 6125,2835 6125,1015 3347.5,1015
D12VGND on Top Layer "D12VGND_L01_P003" (solid, remove dead copper, pour order 3): 6145,2835 6980,2835 6980,1025 cw(c6970,1025) 6970,1015 6145,1015
A12V on Layer 2 (split plane): 6969.9,1040.1 3370.1,1040.1 3370.1,2814.9 6969.9,2814.9
AGND on Layer 1 (split plane): 6969.9,1040.1 3370.1,1040.1 3370.1,2814.9 6969.9,2814.9

## Silkscreen, mask and mechanical layers (free items; w line width, h text height)
Mechanical 1:
  the board outline again, w10

## Text inside footprints (layer, text, board x,y; h text height)
C1: Top Overlay "+" at 6135,1115 h80 r90
C3: Top Overlay "+" at 4681,2635 h80 r180
C9: Top Overlay "+" at 5214,2745 h80
C13: Top Overlay "+" at 5744,2305 h80
C17: Top Overlay "+" at 4036,2605 h80 r180
C18: Top Overlay "+" at 3535,1330 h80 r270
C27: Top Overlay "+" at 4510,1425 h80
C33: Top Overlay "+" at 5135,1315 h80 r180
J1: Top Overlay "1" at 4485,1055 h40; Top Overlay "2" at 4475,1155 h40; Top Overlay "29" at 6027,1047 h40; Top Overlay "30" at 6035,1155 h40